# Altium PCB DUT_STM32F205RET6.PcbDoc
Units mm, origin at the board's own origin, x right, y up, seen from the top; angles counter-clockwise.
Board outline 33 x 90 mm, 2 copper layers (Top Layer, Bottom Layer); 11 components, 61 nets, 224 pads, 0 vias.
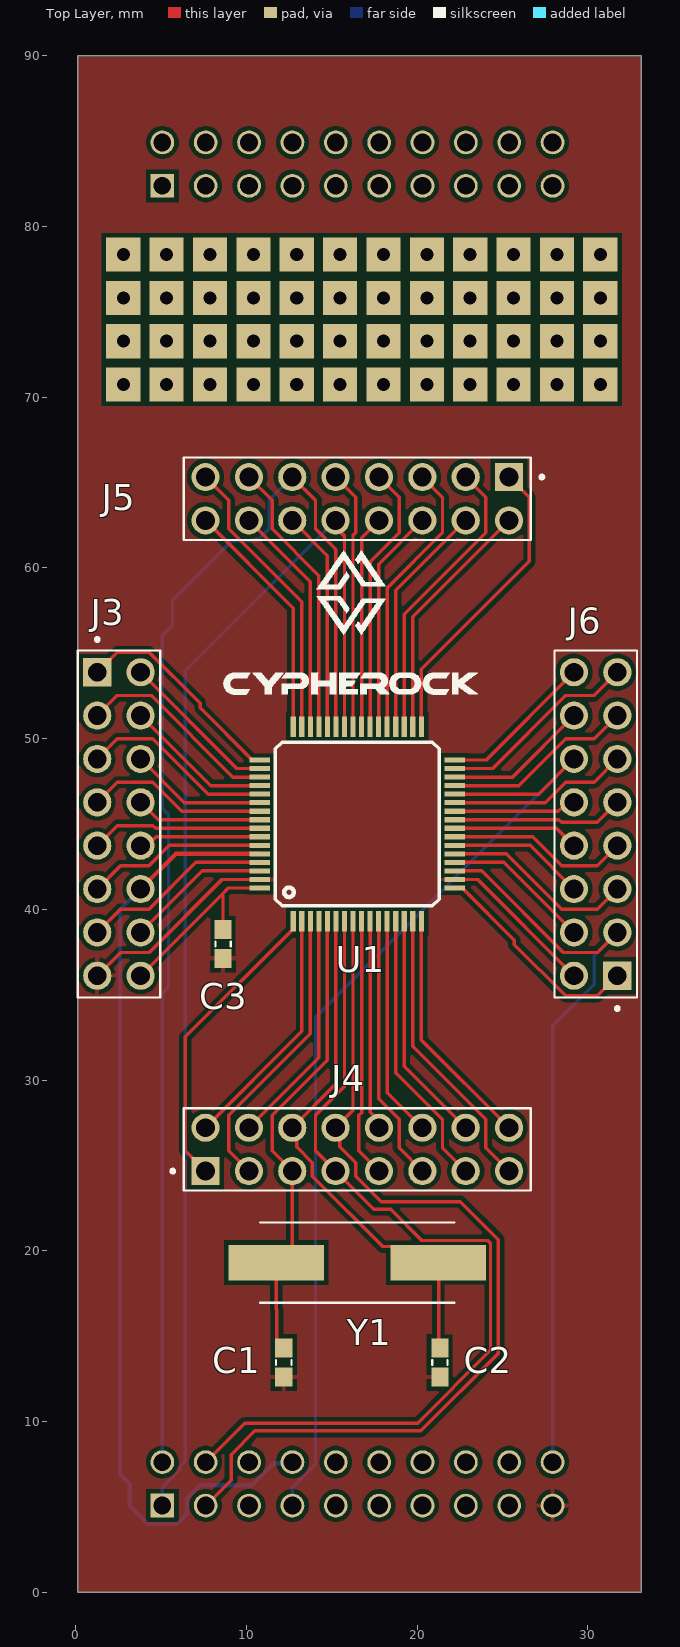
[diagram p0: Top Layer view]
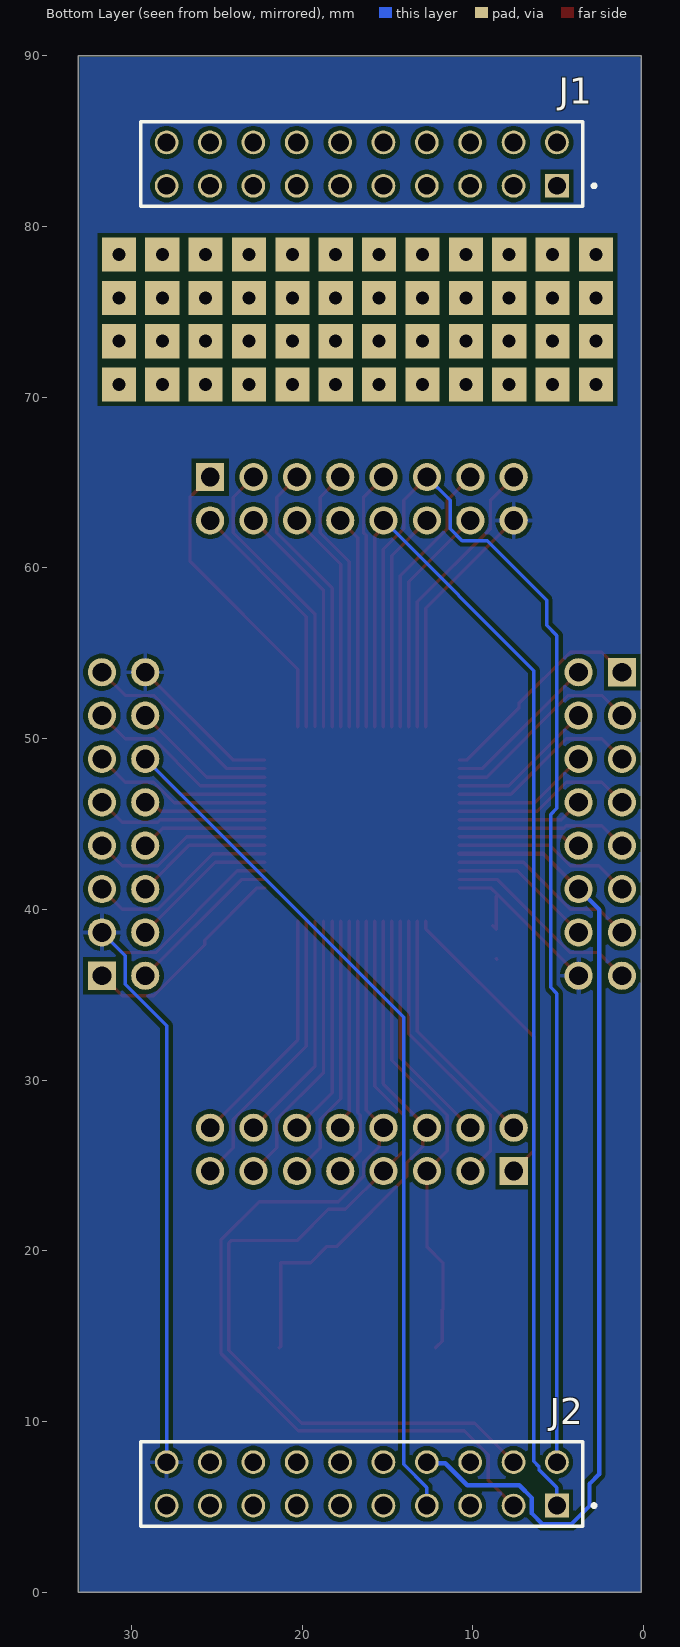
[diagram p1: Bottom Layer view, seen from below]
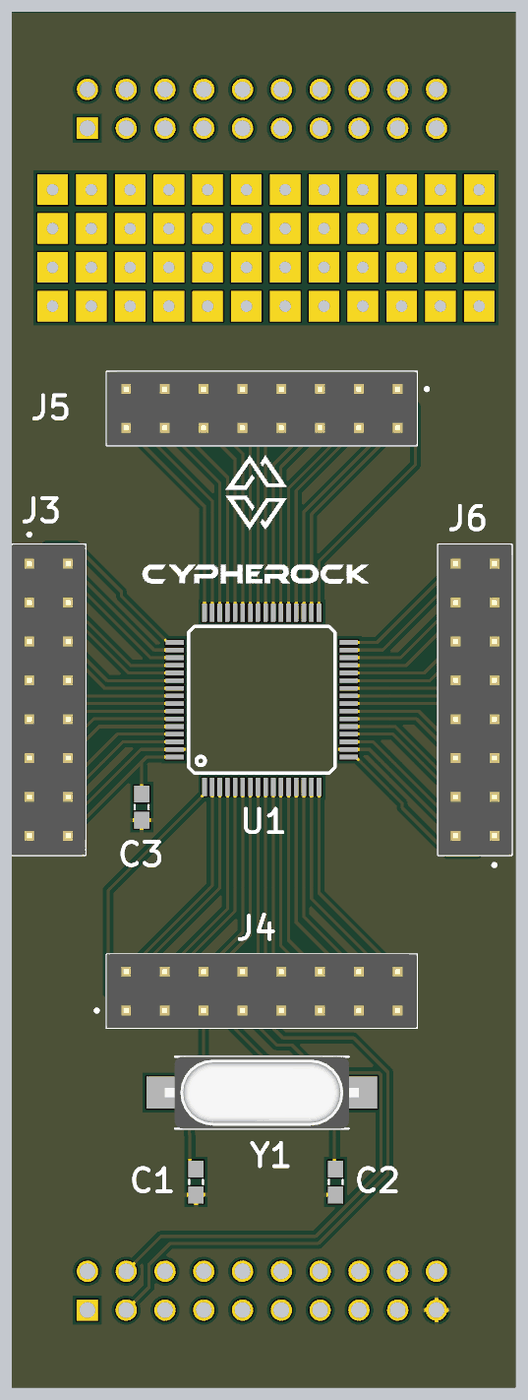
[diagram p2: 3D render of the assembled board from above, using the file's embedded part models]

## Layer stack, top to bottom
Top Solder: solder mask 0.0102, Solder Resist, Dk 3.5
Top Layer: signal copper 0.0356
Dielectric 1: dielectric 0.32, FR-4, Dk 4.8
Bottom Layer: signal copper 0.0356
Bottom Solder: solder mask 0.0102, Solder Resist, Dk 3.5

## Board outline
0.127,0 0.127,90 33.127,90 33.127,0

## Design rules (kind name [scope] priority, off if disabled: settings)
Clearance [All] p1: gap=0.254 ignorepadtopadclearanceinfootprint=FALSE except(0: Arc-Hole Track-Hole SMDPad-Hole THPad-Hole Via-Hole Fill-Hole Poly-Hole Region-Hole Text-Hole; 0.15: Arc-SMDPad Track-SMDPad; 0.2: SMDPad-SMDPad)
PolygonConnect [All] p1: connectstyle=Relief reliefconductorwidth=0.254 reliefentries=4 polygonreliefangle="90 Angle" airgapwidth=0.254
RoutingVias [All] p1: holewidth=0.711 width=1.27 viastyle="Through Hole" minholewidth=0.711 minwidth=1.27 maxholewidth=0.711 maxwidth=1.27
SolderMaskExpansion [All] p1: expansion=0.102 istentingtop=FALSE
Width [All] p1: maxlimit=0.254 minlimit=0.2 preferedwidth=0.254 minimp=50.000000 maximp=50.000000 favimp=50.000000
30 further rules are at their usual default settings.

## Components (designator, comment, footprint, x,y, rotation, side; value= is the part's Value field where it differs from the comment)
C1 "27pF" CAPC1608X90 12.192,13.462 r90 top
C2 "27pF" CAPC1608X90 21.336,13.462 r90 top
C3 "0.1uF" CAPC1608X90 8.636,37.973 r270 top
J1 "SSW-110-01-G-D-LL" SAMTEC_SSW-110-01-G-D-LL 5.08,82.38 r180 bottom
J2 "SSW-110-01-G-D-LL" SAMTEC_SSW-110-01-G-D-LL 5.08,5.08 r180 bottom
J3 "77313-124-16LF" AMPHENOL_77313-124-16LF 2.54,45 r270 top
J4 "77313-124-16LF" AMPHENOL_77313-124-16LF 16.5,25.94 r0 top
J5 "77313-124-16LF" AMPHENOL_77313-124-16LF 16.5,64.05 r180 top
J6 "77313-124-16LF" AMPHENOL_77313-124-16LF 30.46,45 r90 top
U1 "STM32F205RET6" TQFP64-10X10 16.5,45 r90 top locked
Y1 "ABLS-8.000MHZ-B2-T" XTAL_ABLS-8.000MHZ-B2-T 16.5,19.304 r180 top

## Footprints (in the part's own frame and the unit in brackets; to place one, negate y for a bottom-side part, rotate by r counter-clockwise, add the part's x,y. Pads: shape width x height; smd on the part's side, far side on the other; paste and mask are expansions set on the pad)
AMPHENOL_77313-124-16LF [mm]
  rect 1.65x1.65 / inner round 1.65 / far side rect 1.65x1.65 hole 1.1: 01(-8.89,-1.27)
  round 1.65 hole 1.1: 02(-8.89,1.27) 03(-6.35,-1.27) 04(-6.35,1.27) 05(-3.81,-1.27) 06(-3.81,1.27) 07(-1.27,-1.27) 08(-1.27,1.27) 09(1.27,-1.27) 10(1.27,1.27) 11(3.81,-1.27) 12(3.81,1.27) 13(6.35,-1.27) 14(6.35,1.27) 15(8.89,-1.27) 16(8.89,1.27)
  silkscreen extent -10.91,-2.41 10.16,2.41, body extent -10.16,-2.41 10.16,2.41, height 9.3
CAPC1608X90 [mm]
  rect 1.1x1 smd: 1(-0.85,0) 2(0.85,0)
  silkscreen extent -0.15,-0.45 0.15,0.45
SAMTEC_SSW-110-01-G-D-LL [mm]
  rect 1.39x1.39 hole 1.04: 01(0,0)
  round 1.39 hole 1.04: 02(0,2.54) 03(-2.54,0) 04(-2.54,2.54) 05(-5.08,0) 06(-5.08,2.54) 07(-7.62,0) 08(-7.62,2.54) 09(-10.16,0) 10(-10.16,2.54) 11(-12.7,0) 12(-12.7,2.54) 13(-15.24,0) 14(-15.24,2.54) 15(-17.78,0) 16(-17.78,2.54) 17(-20.32,0) 18(-20.32,2.54) 19(-22.86,0) 20(-22.86,2.54)
  silkscreen extent -24.39,-1.21 2.27,3.75
TQFP64-10X10 [mm]
  rect 1.2x0.3 smd: 1(-5.7,3.75) 2(-5.7,3.25) 3(-5.7,2.75) 4(-5.7,2.25) 5(-5.7,1.75) 6(-5.7,1.25) 7(-5.7,0.75) 8(-5.7,0.25) 9(-5.7,-0.25) 10(-5.7,-0.75) 11(-5.7,-1.25) 12(-5.7,-1.75) 13(-5.7,-2.25) 14(-5.7,-2.75) 15(-5.7,-3.25) 16(-5.7,-3.75) 33(5.7,-3.75) 34(5.7,-3.25) 35(5.7,-2.75) 36(5.7,-2.25) 37(5.7,-1.75) 38(5.7,-1.25) 39(5.7,-0.75) 40(5.7,-0.25) 41(5.7,0.25) 42(5.7,0.75) 43(5.7,1.25) 44(5.7,1.75) 45(5.7,2.25) 46(5.7,2.75) 47(5.7,3.25) 48(5.7,3.75)
  rect 0.3x1.2 smd: 17(-3.75,-5.7) 18(-3.25,-5.7) 19(-2.75,-5.7) 20(-2.25,-5.7) 21(-1.75,-5.7) 22(-1.25,-5.7) 23(-0.75,-5.7) 24(-0.25,-5.7) 25(0.25,-5.7) 26(0.75,-5.7) 27(1.25,-5.7) 28(1.75,-5.7) 29(2.25,-5.7) 30(2.75,-5.7) 31(3.25,-5.7) 32(3.75,-5.7) 49(3.75,5.7) 50(3.25,5.7) 51(2.75,5.7) 52(2.25,5.7) 53(1.75,5.7) 54(1.25,5.7) 55(0.75,5.7) 56(0.25,5.7) 57(-0.25,5.7) 58(-0.75,5.7) 59(-1.25,5.7) 60(-1.75,5.7) 61(-2.25,5.7) 62(-2.75,5.7) 63(-3.25,5.7) 64(-3.75,5.7)
  silkscreen extent -4.8,-4.8 4.8,4.8
XTAL_ABLS-8.000MHZ-B2-T [mm]
  rect 5.6x2.1 smd: 1(-4.75,0) 2(4.75,0)
  silkscreen extent -5.7,-2.35 5.7,2.35, body extent -6.35,-2.35 6.35,2.35, height 4.06

## Part data
C1 C2: library part CC0603MRX5R7BB106, "0603", Package=None, Availability=Unavailable, MP=CC0603MRX5R7BB106, Price=None
C3: library part CC0603MRX5R7BB106, "CAP CER 10UF 16V X5R 0603", Package=None, Availability=Unavailable, MP=CC0603MRX5R7BB106, Price=None
J1 J2: Package=None, Availability=Unavailable, MF="Samtec Inc.", MP=SSW-110-01-G-D-LL, Price=None
J3 J4 J5 J6: "BergStikÂ®, Board to Board connector, Unshrouded Header, 2.54 mm Pitch, Vertical, Double Row,Through Hole, 16 Positions", Package=None, Check_prices=https://www.snapeda.com/parts/77313-124-16LF/Amphenol+FCI/view-part/?ref=eda, MF="Amphenol ICC (FCI)", MP=77313-124-16LF, SnapEDA_Link=https://www.snapeda.com/parts/77313-124-16LF/Amphenol+FCI/view-part/?ref=snap
U1: library part STM32F205RCT6, "ARMÂ® CortexÂ®-M3 STM32F2 Microcontroller IC 32-Bit 120MHz 256KB _256K x 8_ FLASH 64-LQFP _10x10_", Package="LQFP-64 STMicroelectronics", Availability=Unavailable, MF=STMicroelectronics, MP=STM32F205RCT6, Price=None, SnapEDA_Link=https://www.snapeda.com/parts/STM32F205RCT6/STMicroelectronics/view-part/563762/?ref=snap
Y1: "HC/49US (AT49) SMD LOW PROFILE CRYSTAL", Package="HC49/US Abracon", Availability="In Stock", Check_prices=https://www.snapeda.com/parts/ABLS-8.000MHZ-B2-T/Abracon+LLC/view-part/?ref=eda, MF="Abracon LLC", MP=ABLS-8.000MHZ-B2-T, Price=None, Purchase-URL=https://pricing.snapeda.com/search/part/ABLS-8.000MHZ-B2-T/?ref=eda, SnapEDA_Link=https://www.snapeda.com/parts/ABLS-8.000MHZ-B2-T/Abracon+LLC/view-part/?ref=snap

## Free pads (board coordinates)
  rect 2x2 hole 0.762: 17(2.794,70.739) 17(2.794,73.279) 17(2.794,75.819) 17(2.794,78.359) 17(5.334,70.739) 17(5.334,73.279) 17(5.334,75.819) 17(5.334,78.359) 17(7.874,70.739) 17(7.874,73.279) 17(7.874,75.819) 17(7.874,78.359) 17(10.414,70.739) 17(10.414,73.279) 17(10.414,75.819) 17(10.414,78.359) 17(12.954,70.739) 17(12.954,73.279) 17(12.954,75.819) 17(12.954,78.359) 17(15.494,70.739) 17(15.494,73.279) 17(15.494,75.819) 17(15.494,78.359) 17(18.034,70.739) 17(18.034,73.279) 17(18.034,75.819) 17(18.034,78.359) 17(20.574,70.739) 17(20.574,73.279) 17(20.574,75.819) 17(20.574,78.359) 17(23.114,70.739) 17(23.114,73.279) 17(23.114,75.819) 17(23.114,78.359) 17(25.654,70.739) 17(25.654,73.279) 17(25.654,75.819) 17(25.654,78.359) 17(28.194,70.739) 17(28.194,73.279) 17(28.194,75.819) 17(28.194,78.359) 17(30.734,70.739) 17(30.734,73.279) 17(30.734,75.819) 17(30.734,78.359)

## Nets (pads, with @x,y where several pads share a name; then routed paths per layer and width w, separated by ;. In a path a pad name is that pad's centre, name@x,y a point inside that pad or via, vN(x,y) a via of type N, cw(c..) or ccw(c..) an arc to the next point about the centre after c; other vN are vias at no path point)
3V3: C3.1 J2.20 J3.16 J5.16 J6.03 J6.16 U1.19 U1.32 U1.48 U1.64 | length 79.4
  Top Layer w0.2: J3.16 8.551,40.851 ; J5.16 12.75,57.64 U1.48 ; C3.1@8.843,39.03 C3.1 8.636,40.767 8.551,40.851 ; U1.64 8.95,41.25 8.551,40.851 ; U1.19 23.8,42.25 28.579,37.471 30.551,37.471 J6.03 ; U1.32 24.05,48.75 J6.16
  Bottom Layer w0.2: J2.20 27.94,33.193 30.369,35.622 30.369,37.289 J6.03
GND: J2.17
GNDA: C1.1 C2.1 C3.2 J2.19 J3.15 J6.02 U1.18 U1.63 | length 21.2
  Top Layer w0.2: J3.15 2.631,37.471 4.298,37.471 8.577,41.75 U1.63 ; C3.2@8.597,37.084 C3.2 ; U1.18 23.55,41.75 J6.02
NetC1_2: C1.2 J4.05 U1.5 Y1.2 | length 27.4
  Top Layer w0.2: Y1.2 11.75,16.579 11.792,16.537 11.792,14.712 C1.2 ; Y1.2@11.76,19.304 12.69,20.234 J4.05 11.511,25.849 11.511,27.929 14.75,31.168 U1.5
NetC2_2: C2.2 J4.06 U1.6 Y1.1 | length 31
  Top Layer w0.2: U1.6 15.25,29.77 J4.06 12.942,26.958 12.942,26.085 13.869,25.158 13.869,24.364 17.979,20.254 18.55,20.254 19.5,19.304 21.26,19.304 21.26,14.388 C2.2
NetJ2_01: J2.01 J5.10 U1.42 | length 74.2
  Top Layer w0.2: J5.10 15.23,62.388 15.75,61.868 U1.42
  Bottom Layer w0.2: J2.01 5.08,6.136 6.129,7.185 6.129,7.362 6.431,7.664 6.431,53.981 J5.10
NetJ2_02: J2.02 J5.11 U1.43 | length 77.7
  Top Layer w0.2: J5.11 14.051,63.959 14.051,62.292 15.25,61.093 U1.43
  Bottom Layer w0.2: J2.02 5.08,35.071 5.443,35.434 5.443,45.557 5.08,45.92 5.08,56.043 5.675,56.638 5.675,58.113 9.163,61.601 10.638,61.601 11.329,62.292 11.329,63.959 J5.11
NetJ2_03: J2.03 J4.08 U1.8 | length 54.1
  Top Layer w0.2: J2.03 9.111,6.571 9.111,8.055 10.506,9.449 20.219,9.449 24.754,13.984 24.754,20.646 22.521,22.879 17.894,22.879 16.409,24.364 16.409,25.158 15.482,26.085 15.482,26.958 J4.08 16.25,28.23 U1.8
NetJ2_04: J2.04 J4.07 U1.7 | length 52.3
  Top Layer w0.2: J2.04 9.903,9.903 20.031,9.903 24.3,14.172 24.3,20.458 24.154,20.604 20.283,20.604 18.462,22.425 17.475,22.425 J4.07 14.051,25.849 14.051,27.929 15.75,29.628 U1.7
NetJ2_07: J2.07 J6.12 U1.28 | length 58.4
  Top Layer w0.2: U1.28 27.13,46.75 J6.12
  Bottom Layer w0.2: J2.07 12.7,6.136 14.051,7.487 14.051,33.671 J6.12
NetJ2_08: J2.08 J3.12 U1.60 | length 56.7
  Top Layer w0.254: J3.12 5.87,43.25 U1.60
  Bottom Layer w0.254: J3.12 2.604,39.984 2.604,6.921 3.175,6.35 3.175,5.056 4.227,4.004 5.933,4.004 6.544,4.615 6.544,5.526 7.288,6.27 10.332,6.27 11.624,7.562 12.642,7.562 J2.08
NetJ3_01: J3.01 U1.49 | length 12.8
  Top Layer w0.2: J3.01 2.449,55.069 4.298,55.069 7.299,52.068 7.299,51.801 10.35,48.75 U1.49
NetJ3_02: J3.02 U1.50 | length 9.3
  Top Layer w0.2: J3.02 9.45,48.25 U1.50
NetJ3_03: J3.03 U1.51 | length 12
  Top Layer w0.2: J3.03 2.449,52.529 4.421,52.529 9.2,47.75 U1.51
NetJ3_04: J3.04 U1.52 | length 8.7
  Top Layer w0.2: J3.04 7.91,47.25 U1.52
NetJ3_05: J3.05 U1.53 | length 11.4
  Top Layer w0.2: J3.05 2.449,49.989 4.529,49.989 7.768,46.75 U1.53
NetJ3_06: J3.06 U1.54 | length 8.1
  Top Layer w0.2: J3.06 6.37,46.25 U1.54
NetJ3_07: J3.07 U1.55 | length 10.7
  Top Layer w0.2: J3.07 2.449,47.449 4.529,47.449 6.228,45.75 U1.55
NetJ3_08: J3.08 U1.56 | length 7.4
  Top Layer w0.2: J3.08 4.83,45.25 U1.56
NetJ3_09: J3.09 U1.57 | length 10.1
  Top Layer w0.2: J3.09 2.449,44.909 4.529,44.909 4.688,44.75 U1.57
NetJ3_10: J3.10 U1.58 | length 7.2
  Top Layer w0.2: J3.10 4.202,43.73 4.722,44.25 U1.58
NetJ3_11: J3.11 U1.59 | length 10.6
  Top Layer w0.2: J3.11 2.631,42.551 4.298,42.551 5.497,43.75 U1.59
NetJ3_13: J3.13 U1.61 | length 11.2
  Top Layer w0.2: J3.13 2.631,40.011 4.298,40.011 7.037,42.75 U1.61
NetJ3_14: J3.14 U1.62 | length 8.5
  Top Layer w0.2: J3.14 7.41,42.25 U1.62
NetJ4_01: J4.01 U1.1 | length 17.7
  Top Layer w0.2: J4.01 6.431,25.849 6.431,32.531 12.75,38.85 U1.1
NetJ4_02: J4.02 U1.2 | length 14.4
  Top Layer w0.2: J4.02 13.25,32.85 U1.2
NetJ4_03: J4.03 U1.3 | length 17.1
  Top Layer w0.2: J4.03 8.971,25.849 8.971,27.929 13.75,32.708 U1.3
NetJ4_04: J4.04 U1.4 | length 13.8
  Top Layer w0.2: J4.04 14.25,31.31 U1.4
NetJ4_09: J4.09 U1.9 | length 15.2
  Top Layer w0.2: U1.9 16.75,28.088 16.591,27.929 16.591,25.849 J4.09
NetJ4_10: J4.10 U1.10 | length 12.3
  Top Layer w0.2: U1.10 17.25,28.122 17.77,27.602 J4.10
NetJ4_11: J4.11 U1.11 | length 15.7
  Top Layer w0.2: U1.11 17.75,28.897 18.949,27.698 18.949,26.031 J4.11
NetJ4_12: J4.12 U1.12 | length 12.9
  Top Layer w0.2: U1.12 18.25,29.27 J4.12
NetJ4_13: J4.13 U1.13 | length 16.3
  Top Layer w0.2: U1.13 18.75,30.437 21.489,27.698 21.489,26.031 J4.13
NetJ4_14: J4.14 U1.14 | length 13.6
  Top Layer w0.2: U1.14 19.25,30.81 J4.14
NetJ4_15: J4.15 U1.15 | length 17
  Top Layer w0.2: U1.15 19.75,31.977 24.029,27.698 24.029,26.031 J4.15
NetJ4_16: J4.16 U1.16 | length 14.2
  Top Layer w0.2: U1.16 20.25,32.35 J4.16
NetJ5_01: J5.01 U1.33 | length 17.7
  Top Layer w0.2: U1.33 20.25,54.075 26.569,60.394 26.569,64.141 J5.01
NetJ5_02: J5.02 U1.34 | length 14.4
  Top Layer w0.2: U1.34 19.75,57.14 J5.02
NetJ5_03: J5.03 U1.35 | length 17.1
  Top Layer w0.2: U1.35 19.25,57.282 24.029,62.061 24.029,64.141 J5.03
NetJ5_04: J5.04 U1.36 | length 13.8
  Top Layer w0.2: U1.36 18.75,58.68 J5.04
NetJ5_05: J5.05 U1.37 | length 16.4
  Top Layer w0.2: U1.37 18.25,58.822 21.489,62.061 21.489,64.141 J5.05
NetJ5_06: J5.06 U1.38 | length 13.1
  Top Layer w0.2: U1.38 17.75,60.22 J5.06
NetJ5_07: J5.07 U1.39 | length 15.8
  Top Layer w0.2: U1.39 17.25,60.362 18.949,62.061 18.949,64.141 J5.07
NetJ5_08: J5.08 U1.40 | length 12.5
  Top Layer w0.2: U1.40 16.75,61.76 J5.08
NetJ5_09: J5.09 U1.41 | length 15.2
  Top Layer w0.2: J5.09 16.409,64.141 16.409,62.061 16.25,61.902 U1.41
NetJ5_12: J5.12 U1.44 | length 12.9
  Top Layer w0.2: J5.12 14.75,60.72 U1.44
NetJ5_13: J5.13 U1.45 | length 16.3
  Top Layer w0.2: J5.13 11.511,63.959 11.511,62.292 14.25,59.553 U1.45
NetJ5_14: J5.14 U1.46 | length 13.6
  Top Layer w0.2: J5.14 13.75,59.18 U1.46
NetJ5_15: J5.15 U1.47 | length 17
  Top Layer w0.2: J5.15 8.971,63.959 8.971,62.292 13.25,58.013 U1.47
NetJ6_01: J6.01 U1.17 | length 12.8
  Top Layer w0.2: U1.17 22.65,41.25 25.701,38.199 25.701,37.932 28.702,34.931 30.551,34.931 J6.01
NetJ6_04: J6.04 U1.20 | length 8.7
  Top Layer w0.2: U1.20 25.09,42.75 J6.04
NetJ6_05: J6.05 U1.21 | length 11.4
  Top Layer w0.2: U1.21 25.232,43.25 28.471,40.011 30.551,40.011 J6.05
NetJ6_06: J6.06 U1.22 | length 8.1
  Top Layer w0.2: U1.22 26.63,43.75 J6.06
NetJ6_07: J6.07 U1.23 | length 10.7
  Top Layer w0.2: U1.23 26.772,44.25 28.471,42.551 30.551,42.551 J6.07
NetJ6_08: J6.08 U1.24 | length 7.4
  Top Layer w0.2: U1.24 28.17,44.75 J6.08
NetJ6_09: J6.09 U1.25 | length 10.1
  Top Layer w0.2: U1.25 28.312,45.25 28.471,45.091 30.551,45.091 J6.09
NetJ6_10: J6.10 U1.26 | length 7.2
  Top Layer w0.2: U1.26 28.278,45.75 28.798,46.27 J6.10
NetJ6_11: J6.11 U1.27 | length 10.6
  Top Layer w0.2: U1.27 27.503,46.25 28.702,47.449 30.369,47.449 J6.11
NetJ6_13: J6.13 U1.29 | length 11.2
  Top Layer w0.2: U1.29 25.963,47.25 28.702,49.989 30.369,49.989 J6.13
NetJ6_14: J6.14 U1.30 | length 8.5
  Top Layer w0.2: U1.30 25.59,47.75 J6.14
NetJ6_15: J6.15 U1.31 | length 11.9
  Top Layer w0.2: U1.31 24.423,48.25 28.702,52.529 30.369,52.529 J6.15
pads on no net: J1.01 J1.02 J1.03 J1.04 J1.05 J1.06 J1.07 J1.08 J1.09 J1.10 J1.11 J1.12 J1.13 J1.14 J1.15 J1.16 J1.17 J1.18 J1.19 J1.20 J2.05 J2.06 J2.09 J2.10 J2.11 J2.12 J2.13 J2.14 J2.15 J2.16 J2.18

## Polygon pours and split planes (outlines as drawn)
3V3 on Bottom Layer "3V3_L02_P002" (solid, pour order 2): 0.254,89.916 0.127,89.789 0.127,0 33.147,0 33.02,0.127 33.02,89.916
GNDA on Top Layer "GNDA_L01_P001" (solid, pour order 1): 0.127,89.916 0.127,0 33.147,0 33.147,89.916

## Silkscreen, mask and mechanical layers (free items; w line width, h text height)
Top Overlay:
  drawing of 11 lines, arcs and shapes, not listed